# EAGLE board LED array - interface v1.3 (EAGLE 6.5.0)
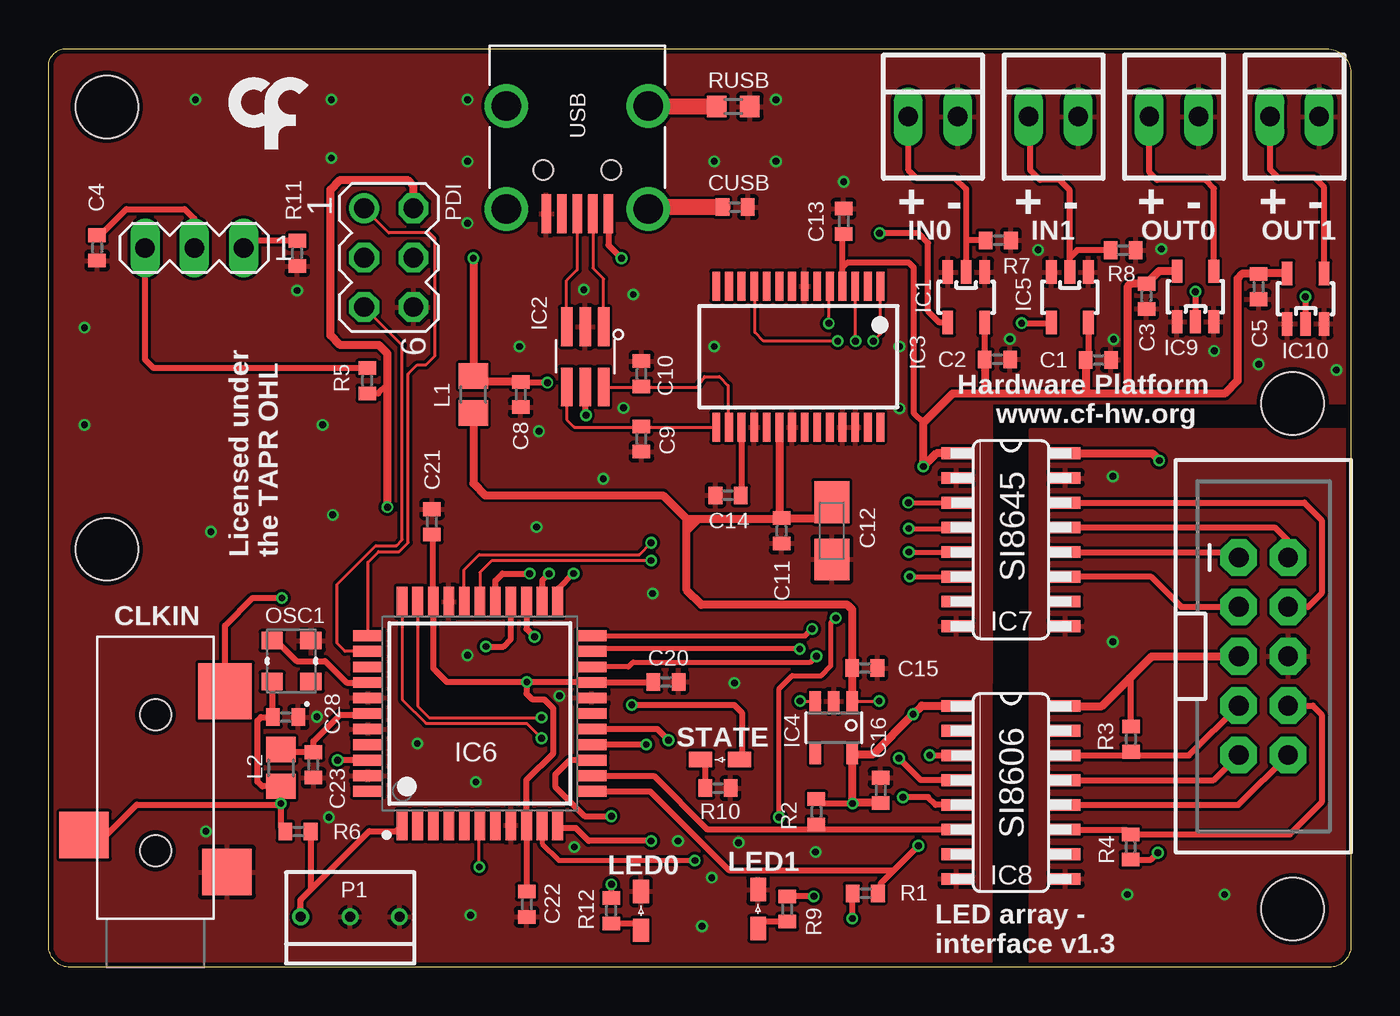
[diagram p0: board, top side]
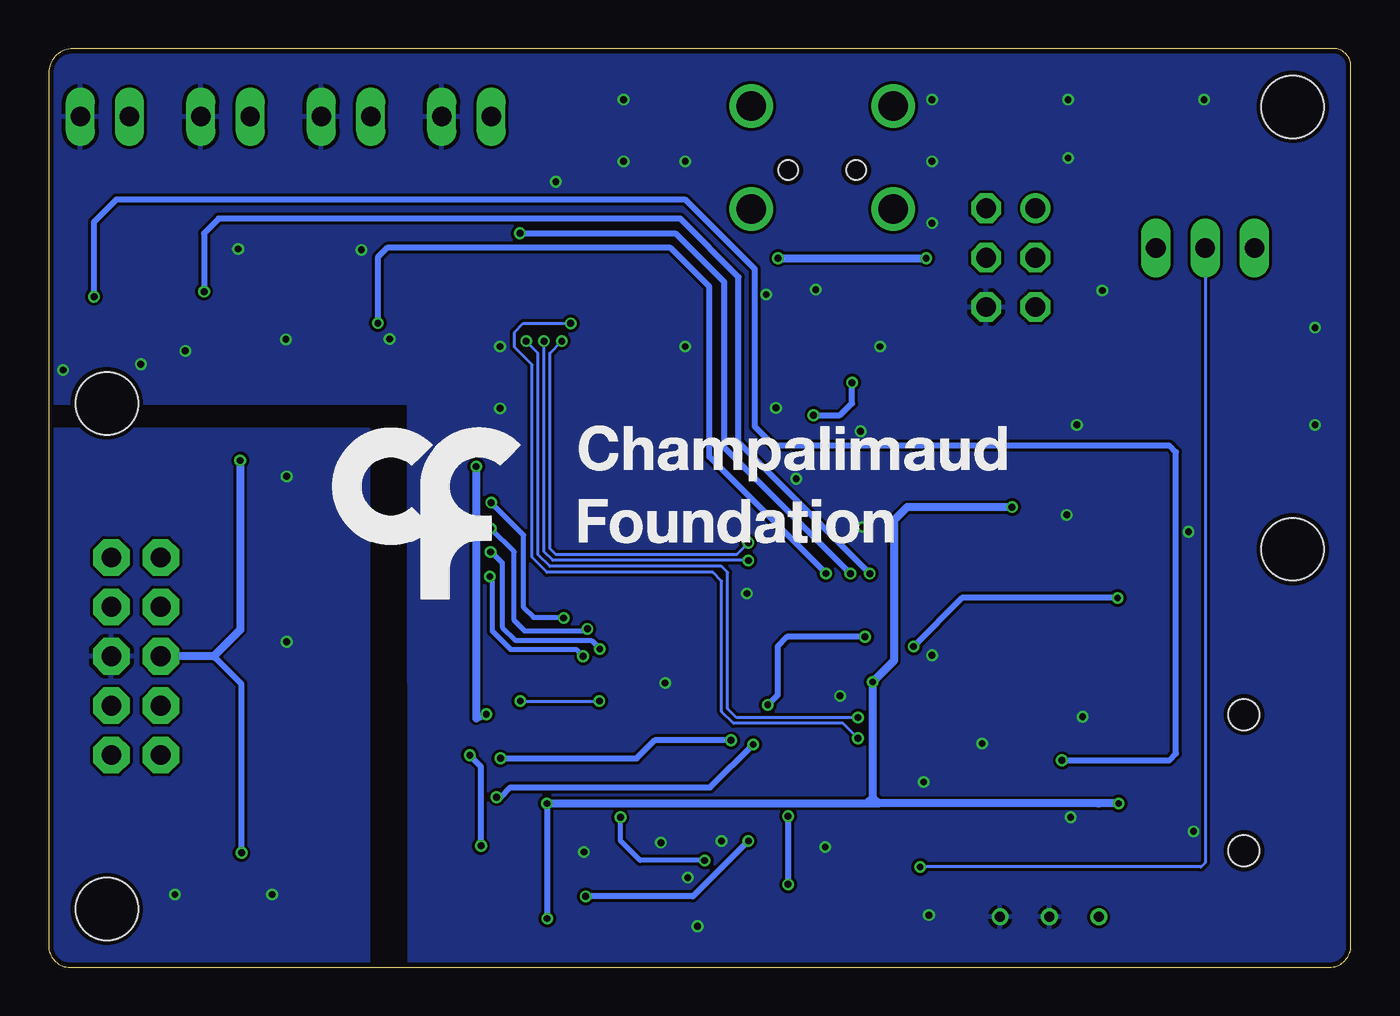
[diagram p1: board, bottom side, seen from below]

Size 67 x 47.25 mm. Coordinates in mm from the lower left corner, seen from the top.
Outline: 67,46 67,1.12 arc-90 65.88,0 1.12,0 arc-90 0,1.12 0,46.35 arc-90 0.9,47.25 65.75,47.25 arc-90 67,46
Copper layers (1*16): Top 0.018mm / dielectric 1.55mm / Bottom 0.018mm
Design rules "eC_2Layer_PClass6_BaseCopperO18_eCDefault *": minimum track width 0.15mm, minimum drill 0.35mm, track to track 0.15mm, track to pad 0.15mm, pad to pad 0.15mm, via to via 0.15mm, smd to smd 0mil, copper to edge 0.25mm, drill to drill 0.35mm, minimum pad ring 0.175mm, minimum via ring 0.125mm, stop-mask expansion 0mil, vias tented up to drill 0.45mm, thermal gap 0.2mm
Holes 3.2 mm at 3,44.25 3,21.5 64,29 64,3

## Footprints (pad centres in the part's own frame; a part is rotated, then mirrored left to right if it is on the bottom)
C0402 = smd 0.7 x 0.9: 1 -0.65,0; 2 0.65,0
A/3216-18W = smd 2.15 x 1.8: + 1.475,0; - -1.475,0
35RASMT2BHNTRX = smd 2.4 x 2.55: 1 0.8,3.675; 5 -1.1,-3.675 | smd 2.9 x 2.75: 4 8.2,-3.575 | hole 1.6: 0,0; 7,0
SOT23-5 = smd 0.55 x 1.2: 1 -0.95,-1.3; 2 0,-1.3; 3 0.95,-1.3; 4 0.95,1.3; 5 -0.95,1.3
SOT23-6L = smd 0.6 x 2: P$1 -0.95,-1.55; P$2 0,-1.55; P$3 0.95,-1.55; P$4 0.95,1.55; P$5 0,1.55; P$6 -0.95,1.55
SSOP28 = smd 0.4 x 1.5: 1 -4.225,-3.625; 2 -3.575,-3.625; 3 -2.925,-3.625; 4 -2.275,-3.625; 5 -1.625,-3.625; 6 -0.975,-3.625; 7 -0.325,-3.625; 8 0.325,-3.625; 9 0.975,-3.625; 10 1.625,-3.625; 11 2.275,-3.625; 12 2.925,-3.625; 13 3.575,-3.625; 14 4.225,-3.625; 15 4.225,3.625; 16 3.575,3.625; 17 2.925,3.625; 18 2.275,3.625; 19 1.625,3.625; 20 0.975,3.625; 21 0.325,3.625; 22 -0.325,3.625; 23 -0.975,3.625; 24 -1.625,3.625; 25 -2.275,3.625; 26 -2.925,3.625; 27 -3.575,3.625; 28 -4.225,3.625
TSOT23-5 = smd 0.6 x 1.05: 1 -0.95,-1.354; 2 0,-1.354; 3 0.95,-1.354; 4 0.95,1.354; 5 -0.95,1.354
QFP80P1200X1200X120-44N = smd 1.55 x 0.55: 1 -5.75,4; 2 -5.75,3.2; 3 -5.75,2.4; 4 -5.75,1.6; 5 -5.75,0.8; 6 -5.75,0; 7 -5.75,-0.8; 8 -5.75,-1.6; 9 -5.75,-2.4; 10 -5.75,-3.2; 11 -5.75,-4; 23 5.75,-4; 24 5.75,-3.2; 25 5.75,-2.4; 26 5.75,-1.6; 27 5.75,-0.8; 28 5.75,0; 29 5.75,0.8; 30 5.75,1.6; 31 5.75,2.4; 32 5.75,3.2; 33 5.75,4 | smd 0.55 x 1.55: 12 -4,-5.75; 13 -3.2,-5.75; 14 -2.4,-5.75; 15 -1.6,-5.75; 16 -0.8,-5.75; 17 0,-5.75; 18 0.8,-5.75; 19 1.6,-5.75; 20 2.4,-5.75; 21 3.2,-5.75; 22 4,-5.75; 34 4,5.75; 35 3.2,5.75; 36 2.4,5.75; 37 1.6,5.75; 38 0.8,5.75; 39 0,5.75; 40 -0.8,5.75; 41 -1.6,5.75; 42 -2.4,5.75; 43 -3.2,5.75; 44 -4,5.75
NSOIC-16 = smd 0.6 x 1.55: 1 -4.437,-2.789; 2 -3.167,-2.789; 3 -1.897,-2.789; 4 -0.627,-2.789; 5 0.643,-2.789; 6 1.913,-2.789; 7 3.183,-2.789; 8 4.453,-2.789; 9 4.453,2.811; 10 3.183,2.811; 11 1.913,2.811; 12 0.643,2.811; 13 -0.627,2.811; 14 -1.897,2.811; 15 -3.167,2.811; 16 -4.437,2.811
22-23-2021 = drill 1 long: 1 -1.27,0; 2 1.27,0
2X5-SHROUDED = drill 1.016 pad 1.88 octagon: 1 -1.27,5.08; 2 1.27,5.08; 3 -1.27,2.54; 4 1.27,2.54; 5 -1.27,0; 6 1.27,0; 7 -1.27,-2.54; 8 1.27,-2.54; 9 -1.27,-5.08; 10 1.27,-5.08
R0805 = smd 1.3 x 1.5: 1 -0.95,0; 2 0.95,0
LED_HAND = smd 1.2 x 0.8: A -1,0; K 1,0
OSCILLATOR_3.2X2.5 = smd 0.9 x 1.1: P$1 -1.05,-1; P$2 1.05,-1; P$3 1.05,1; P$4 -1.05,1
POT_BOURNS_3362M = drill 0.51: 1 -2.54,0; 2 0,0; 3 2.54,0
MA03-2 = drill 1.016: 1 -2.54,-1.27 | drill 1.016 octagon: 2 -2.54,1.27; 3 0,-1.27; 4 0,1.27; 5 2.54,-1.27; 6 2.54,1.27
R0402 = smd 0.7 x 0.9: 1 -0.65,0; 2 0.65,0
R0603 = smd 1 x 1.1: 1 -0.85,0; 2 0.85,0
MA03-1 = drill 1.016 long: 1 -2.54,0; 2 0,0; 3 2.54,0
240-0002-1 = smd 0.5 x 2: P$1 -1.6,8.65; P$2 -0.8,8.65; P$3 0,8.65; P$4 0.8,8.65; P$5 1.6,8.65 | drill 1.5: SHIELD_1 -3.65,3.1; SHIELD_2 3.65,3.1; SHIELD_3 3.65,8.4; SHIELD_4 -3.65,8.4 | hole 1: -1.75,6.4; 1.75,6.4

## Placement (x,y rotation side)
C1  100nF  [C0402]  54.01,31.24 0 top
C2  100nF  [C0402]  48.81,31.27 0 top
C3  100nF  [C0402]  56.48,34.51 270 top
C4  330nF NA  [C0402]  2.5,37 270 top
C5  100nF  [C0402]  62.25,35.01 270 top
C8  100nF  [C0402]  24.29,29.46 270 top
C9  47pF  [C0402]  30.5,27.18 270 top
C10  47pF  [C0402]  30.5,30.53 90 top
C11  100nF  [C0402]  37.7,22.45 270 top
C12  4.7uF  [A/3216-18W]  40.3,22.45 90 top
C13  100nF  [C0402]  40.9,38.37 90 top
C14  100nF  [C0402]  34.96,24.28 180 top
C15  4.7uF  [C0402]  41.99,15.39 180 top
C16  4.7uF  [C0402]  42.8,9.1 270 top
C20  100nF  [C0402]  31.76,14.68 0 top
C21  100nF  [C0402]  19.72,22.91 90 top
C22  100nF  [C0402]  24.6,3.25 270 top
C23  330nF  [C0402]  13.63,10.41 270 top
C28  100nF  [C0402]  12.2,12.87 0 top
CLKIN  [35RASMT2BHNTRX]  5.5,6 90 top
CUSB  4.7nF  [C0402]  35.32,39.1 0 top
IC1  SN74LVC1G125  [SOT23-5]  47.21,34.46 180 top
IC2  USBLC6-2SC6  [SOT23-6L]  27.61,31.4 180 top
IC3  FT232RL  [SSOP28]  38.57,31.41 180 top
IC4  LP5907  [TSOT23-5]  40.4,12.33 180 top
IC5  SN74LVC1G125  [SOT23-5]  52.54,34.46 180 top
IC6  ATXMEGAxxxA4U-AU  [QFP80P1200X1200X120-44N]  22.19,13.05 90 top
IC7  SI8645  [NSOIC-16]  49.5,22 270 top
IC8  SI8606  [NSOIC-16]  49.5,9 270 top
IC9  SN74LVC1G125  [SOT23-5]  59,34.5 0 top
IC10  SN74LVC1G125  [SOT23-5]  64.67,34.39 0 top
IN0  22-23-2021  [22-23-2021]  45.5,43.75 0 top
IN1  22-23-2021  [22-23-2021]  51.7,43.75 0 top
JP1  M05X2SHD  [2X5-SHROUDED]  62.5,16 0 top
L1  ???  [R0805]  21.85,29.46 90 top
L2  1u  [R0805]  11.95,10.26 270 top
LED0  GREEN  [LED_HAND]  30.48,2.91 90 top
LED1  GREEN  [LED_HAND]  36.5,3 90 top
OSC1  [OSCILLATOR_3.2X2.5]  12.5,15.75 90 top
OUT0  22-23-2021  [22-23-2021]  57.9,43.75 0 top
OUT1  22-23-2021  [22-23-2021]  64.1,43.75 0 top
P1  POT_BOURNS_3362M  [POT_BOURNS_3362M]  15.51,2.6 180 top
PDI  [MA03-2]  17.5,36.5 270 top
R1  3k  [R0402]  42.02,3.81 180 top
R2  3k  [R0402]  39.5,8 90 top
R3  3k  [R0402]  55.68,11.74 90 top
R4  3k  [R0402]  55.66,6.19 270 top
R5  100k NA  [R0402]  16.39,30.17 270 top
R6  1k 0.1%  [R0402]  12.83,6.99 180 top
R7  100k  [R0402]  48.86,37.39 180 top
R8  100k  [R0402]  55.28,36.88 180 top
R9  68  [R0402]  38,3 90 top
R10  68  [R0402]  34.44,9.21 180 top
R11  100k NA  [R0402]  12.79,36.72 90 top
R12  68  [R0402]  28.94,2.92 90 top
RUSB  1M  [R0603]  35.23,44.27 0 top
STATE  GREEN  [LED_HAND]  34.54,10.69 180 top
SV1  NA  [MA03-1]  7.5,37 180 top
U$1  [LOGO_5]  49.33,24.66 0 bottom
U$3  [LOGO_7]  10.5,44.5 0 top
USB  [240-0002-1]  27.2,47.4 180 top

## Library data of the parts
C1-C5 C8-C16 C20-C23 C28 CUSB L1 L2 R1-R12 RUSB = rcl
CLKIN USB = CNP-connectors
IC1 IC5 IC9 IC10 = My_library 0v2
IC2 = CNP 2
IC3 = ftdichip; MPN: FT232RL; OC_FARNELL: 1146032; OC_NEWARK: 91K9918
IC4 IC7 IC8 = CNP-ics 2
IC6 = xmega-a4
IN0 IN1 OUT0 OUT1 = con-molex; MF: MOLEX; MPN: 22-23-2021; OC_FARNELL: 1462926; OC_NEWARK: 25C3832
JP1 = SparkFun-Connectors
LED0 LED1 OSC1 P1 STATE U$1 U$3 = CNP-miscellaneous
PDI SV1 = con-lstb; OC_FARNELL: unknown; OC_NEWARK: unknown

## Nets
ADC: IC6.1 P1.3 R6.1
ADC1: R5.1 SV1.3
AUX0: IC6.22 IC7.4
AUX1: IC6.21 IC7.5
AVCC: C23.1 IC6.39 L2.1
CLK: IC8.11 JP1.8 R4.1
CLK_SYNC: CLKIN.4 IC6.26
DAT: IC8.14 JP1.7 R3.1
DO2: IC7.13 JP1.2
DO3: IC7.12 JP1.1
FT_CTS: IC3.11 IC6.29
FT_RTS: IC3.3 IC6.28
FT_RXD: IC3.5 IC6.33
FT_TXD: IC3.1 IC6.32
GND: IC7.9 IC7.15 IC8.9 JP1.6
GND2: IC5.2 IN1.1 R8.2
GNDIO: C1.2 C2.2 C3.2 C4.2 C5.2 C8.2 C9.2 C10.2 C11.2 C12.- C13.2 C14.2 C15.1 C16.1 C20.2 C21.2 C22.2 C23.2 C28.2 CLKIN.5 CUSB.2 IC1.1 IC1.3 IC2.P$2 IC3.7 IC3.18 IC3.21 IC3.25 IC3.26 IC4.2 IC5.1 IC5.3 IC6.8 IC6.18 IC6.30 IC6.38 IC6.40 IC6.43 IC7.2 IC7.8 IC8.8 IC9.1 IC9.3 IC10.1 IC10.3 IN0.2 IN1.2 LED0.K LED1.K OSC1.P$2 OUT0.2 OUT1.2 P1.1 P1.2 PDI.6 R7.1 R8.1 R10.1 R11.1 RUSB.2 USB.P$5
IN0: IC1.4 IC6.24
IN1: IC5.4 IC6.23
LED0: IC6.14 R12.2
LED0_PWR: IC6.15 IC8.5
LED0_TRANS: IC6.10 IC7.3
LED1: IC6.11 R9.2
LED1_PWR: IC6.16 IC8.4
LED1_TRANS: IC6.20 IC7.6
MODE0: C4.1 IC6.6 SV1.2
N$1: R11.2 SV1.1
N$2: C14.1 IC3.17
N$3: IC9.4 OUT0.1
N$4: IC2.P$3 USB.P$3
N$6: LED0.A R12.1
N$7: IC10.4 OUT1.1
N$8: R10.2 STATE.K
N$9: IC1.2 IN0.1 R7.2
N$24: LED1.A R9.1
N$39: C8.1 IC2.P$5 L1.2 USB.P$1
N$40: IC2.P$1 USB.P$2
N$59: CUSB.1 USB.SHIELD_4
N$61: RUSB.1 USB.SHIELD_1
ON_IR: IC8.13 JP1.9
ON_LED: IC8.12 JP1.10
OSC1: IC6.37 OSC1.P$3
OUT0: IC6.27 IC9.2
OUT1: IC6.42 IC10.2
PDI-CLK: IC6.35 PDI.5
PDI-DATA: IC6.34 PDI.1
SCL: IC6.13 IC8.6 R2.1
SDA: IC6.12 IC8.3 R1.1
STATE_: IC6.25 STATE.A
TOG_IR: IC7.11 JP1.3
TOG_RED: IC7.14 JP1.4
USB5V: C11.1 C12.+ C15.2 IC3.20 IC4.1 IC4.3 L1.1
USBDM: C10.1 IC2.P$6 IC3.16
USBDP: C9.1 IC2.P$4 IC3.15
VCCIO: C1.1 C2.1 C3.1 C5.1 C13.1 C16.2 C20.1 C21.1 C22.1 C28.1 CLKIN.1 IC1.5 IC3.4 IC4.5 IC5.5 IC6.9 IC6.19 IC6.31 IC7.1 IC8.1 IC9.5 IC10.5 L2.2 OSC1.P$4 PDI.2 R1.2 R2.2 R5.2 R6.2
VDD: IC7.16 IC8.16 JP1.5 R3.2 R4.2

## Tracks (layer width: path | path; a pad name or v marks a point on that pad's centre or on a via)
ADC
  Top 0.305: 13.48,3.98 16.5,7 17.89,7 IC6.1 | 12.94,3.02 P1.3 12.96,3.46 13,3.5 13.48,3.98 | R6.1 13.48,3.98
ADC1
  Top 0.305: 5,36.96 SV1.3 4.97,31.25 5.4,30.82 R5.1
AUX0  (via drill 0.35 pad 0.6)
  Top 0.254: IC6.22 38.92,17.05 v39.28,17.41 | v44.25,22.57 46.65,22.57 IC7.4
  Bottom 0.254: v44.25,22.57 43.05,21.37 43.05,17.84 42.52,17.31 39.38,17.31 v39.28,17.41
AUX1  (via drill 0.35, 0.35 pad 0.6)
  Top 0.254: v38.64,16.37 28.06,16.37 IC6.21 | v44.26,21.36 IC7.5
  Bottom 0.254: v38.64,16.37 39.08,16.81 42.97,16.81 43.66,17.5 43.66,20.81 44.21,21.36 44.38,21.36 v44.26,21.36
AVCC
  Top 0.305: IC6.39 16.39,13 15,13 13.62,11.63 C23.1 11.95,11.06 L2.1
CLK
  Top 0.305: 52.4,7 IC8.11 52.35,7.05 55.5,7.05 55.66,6.89 R4.1 63.86,6.84 65.5,8.48 65.5,13 65.04,13.46 JP1.8
CLK_SYNC  (via drill 0.35)
  Top 0.305: CLKIN.4 9.07,17.57 10.5,19 v12,19 | v22.5,16.5 23.4,16.5 23.79,16.89 IC6.26
  Bottom 0.305: v12,19 20,19 v22.5,16.5
DAT
  Top 0.305: IC8.14 55.5,10.9 | JP1.7 58.67,10.9 55.5,10.9 | R3.1 55.68,11.08 55.5,10.9
DO2
  Top 0.305: IC7.13 63.08,22.63 63.75,21.96 63.75,21.1 JP1.2
DO3
  Top 0.305: IC7.12 60.96,21.35 JP1.1
FT_CTS  (via drill 0.35)
  Top 0.152: IC6.29 21.39,20.46 22.16,21.23 30.39,21.23 v31,21.84 | v40.6,32.2 36.79,32.2 36.33,32.66 36.33,35 IC3.11
  Bottom 0.152: v31,21.84 31.61,21.23 40.91,21.23 41.21,21.54 41.21,31.59 v40.6,32.2
FT_RTS  (via drill 0.35)
  Top 0.152: v31,20.93 22.81,20.93 22.19,20.31 IC6.28 | v41.51,32.2 41.51,35.02 IC3.3
  Bottom 0.152: v31,20.93 41.06,20.93 41.51,21.38 v41.51,32.2
FT_RXD  (via drill 0.35)
  Top 0.152: IC6.33 18.19,13.77 19.42,12.54 24.6,12.54 v25.36,11.78 | v40.14,33.12 40.14,34.98 IC3.5
  Bottom 0.152: v25.36,11.78 26.12,12.54 31.76,12.54 32.37,13.15 32.37,19.86 32.83,20.32 41.36,20.32 42.12,21.08 42.12,30.98 43.04,31.9 43.04,32.66 42.58,33.12 v40.14,33.12
FT_TXD  (via drill 0.35)
  Top 0.152: IC6.32 18.99,13.43 19.57,12.85 v25.36,12.85 | v42.43,32.2 42.8,32.57 IC3.1
  Bottom 0.152: v25.36,12.85 31.61,12.85 32.07,13.31 32.07,20.32 32.37,20.62 41.21,20.62 41.82,21.23 41.82,31.59 v42.43,32.2
GND  (via drill 0.35)
  other vias: 55.5,3.75 60.5,3.75 54.75,16.75 54.75,25.25
  pour Top: 50.5,0.16 50.5,27.67 66.99,27.67 66.99,0.16
  pour Bottom: 50.5,0.16 50.5,27.67 66.99,27.67 66.99,0.16
GND2
  Top 0.305: IC5.2 52.54,36.5 | R8.2 52.92,36.88 52.54,36.5 | 52.54,36.5 52.54,39.96 52,40.5 51,40.5 50.5,41 50.5,43.68 IN1.1
GNDIO  (via drill 0.35)
  other vias: 34.25,41.45 21.55,41.45 8.35,22.4 21.98,9.53 37.42,41.45 37.42,44.62 30.07,34.6 43.77,31.93 43.77,28.75 34.25,31.93 31.07,19.23 21.55,44.62 21.55,38.27 24.23,31.93 25.23,27.57 18.98,11.51 21.55,16.05 14.62,23.27 8.09,7 35.28,14.62 21.71,2.69 14.55,44.62 25.1,22.65 57.24,36.95 59.97,31.7 49.45,32.31 54.8,32.3 39.46,5.93 7.55,44.62 14.55,41.62 1.85,27.9 1.85,32.9 14.1,27.9 12.79,34.81 34.12,4.62 33.62,2.12 35.5,6.42 40.91,40.4 66.25,30.73 50.91,36.9 62.26,31.02 13.8,12.89 29.57,28.77 28.54,25.12 14.42,7.72 27.54,34.85 32.38,6.5 27.04,6.19 26.28,13.96
  pour Top: 0.16,0.16 0.16,47.25 67,47.25 67,29 48.5,29 48.49,0.16
  pour Bottom: 0.16,0.16 0.16,47.25 67,47.25 67,29 48.5,29 48.49,0.16
IN0  (via drill 0.35 pad 0.6)
  Top 0.305: v25.75,20.25 v25.74,20.25 25.39,19.9 IC6.24 | IC1.4 45.84,33.16 45.25,33.75 45.25,37.25 44.75,37.75 v42.75,37.75
  Bottom 0.305: v42.75,37.75 34.75,37.75 32.25,35.25 32.25,26.75 v25.75,20.25
IN1  (via drill 0.35 pad 0.6)
  Top 0.305: v50.06,33.13 51.56,33.13 IC5.4 | 26.19,19.2 IC6.23 26.25,18.86 26.25,19.5 v27.01,20.26
  Bottom 0.305: v27.01,20.26 33,26.25 33,35 35,37 49.58,37 50.07,36.51 v50.07,33.14 v50.06,33.13
LED0  (via drill 0.35)
  Top 0.254: IC6.14
  Top 0.305: IC6.14 26.8,10.65 26.06,9.91 26.06,9.3 27.58,7.77 v28.96,7.77 | v28.96,4.27 28.94,4.25 R12.2
  Bottom 0.305: v28.96,7.77 v28.96,4.27
LED0_PWR  (via drill 0.35)
  Top 0.305: IC8.5 45.64,8.36 45.25,8.75 v43.95,8.75 | v30.75,11.46 IC6.15
  Bottom 0.305: v43.95,8.75 43.75,8.75 43.25,9.25 32.96,9.25 v30.75,11.46
LED0_TRANS  (via drill 0.35, 0.35 pad 0.6)
  Top 0.254: v44.23,23.9 IC7.3 | 40.29,17.76 v40.5,17.97 40.25,17.72 40.25,15.5 39.75,15 38.25,15 37.58,14.33 v37.58,7.72 | IC6.10 25.39,6.36 26.25,5.5 v33.25,5.5
  Bottom 0.254: v40.5,17.97 40.78,18 42.06,18 42.56,18.5 42.56,22.23 v44.23,23.9 | v33.25,5.5 36.56,5.5 37.58,6.52 v37.58,7.72
LED1  (via drill 0.35)
  Top 0.305: v39.37,3.65 R9.2 | v31,6.5 27.79,6.5 27.13,7.16 26.33,7.16 IC6.11
  Bottom 0.305: v31,6.5 33.85,3.65 v39.37,3.65
LED1_PWR  (via drill 0.35, 0.35 pad 0.6)
  Top 0.305: IC8.4 44.87,9.63 v43.75,10.75 | IC6.16 31.32,12.25 v31.89,11.68
  Bottom 0.305: v43.75,10.75 36.75,10.75 35.82,11.68 v31.89,11.68
LED1_TRANS  (via drill 0.35 pad 0.6)
  Top 0.254: IC6.20 29.82,15.45 30.07,15.7 39.2,15.7 v39.5,16 | v44.3,20.1 46.7,20.1
  Top 0.305: 46.7,20.1 IC7.6
  Bottom 0.254: v39.5,16 39.85,16.35 43.24,16.35 44.17,17.28 44.17,19.97 v44.3,20.1
MODE0  (via drill 0.35)
  Top 0.152: v22.16,5.16 22.16,7.28 IC6.6
  Top 0.305: C4.1 2.65,37.65 4,39 7,39 7.5,38.5 SV1.2
  Bottom 0.152: v22.16,5.16 7.72,5.16 7.5,5.38 SV1.2
N$1
  Top 0.305: R11.2 10.41,37.37 SV1.1
N$2
  Top 0.305: IC3.17 35.65,24.32 C14.1
N$3
  Top 0.305: IC9.4 59.95,40.05 59.5,40.5 57.02,40.5 56.64,40.88 OUT0.1
  Top 0.406: OUT0.1
N$4
  Top 0.152: IC2.P$3 26.66,35.33 27.2,35.87 USB.P$3
N$6
  Top 0.305: R12.1 30.12,2.27 LED0.A
N$7
  Top 0.305: IC10.4 65.62,40.11 65.13,40.6 63.27,40.6 62.84,41.03 OUT1.1
N$8
  Top 0.305: R10.2 33.79,10.44 STATE.K
N$9
  Top 0.305: IC1.2 47.21,37.5 | 47.21,37.5 47.21,40.02 46.64,40.59 44.65,40.59 44.24,41 IN0.1 | R7.2 47.32,37.39 47.21,37.5
N$24
  Top 0.305: R9.1 36.85,2.35 LED1.A
N$39  (via drill 0.35)
  Top 0.305: IC2.P$5 27.61,28.43 v27.65,28.39 | v25.66,30.07 24.33,30.07 C8.1 | USB.P$1 28.8,37.15 v29.48,36.47
  Top 0.406: v21.86,36.47 L1.2 22.16,30.11 C8.1
  Bottom 0.305: v27.65,28.39 26.27,28.39 25.66,29 v25.66,30.07
  Bottom 0.406: v29.48,36.47 v21.86,36.47
N$40
  Top 0.152: IC2.P$1 28.56,35.41 28,35.97 USB.P$2
N$59
  Top 0.813: CUSB.1 30.95,39.1 USB.SHIELD_4
N$61
  Top 0.813: RUSB.1 30.88,44.27 USB.SHIELD_1
ON_IR
  Top 0.305: IC8.13 59.94,9.63 JP1.9
ON_LED
  Top 0.305: IC8.12 61.21,8.36 JP1.10
OSC1
  Top 0.305: OSC1.P$3 11.7,16.8 12.75,15.75 14.22,15.75 15.33,14.64 16.43,14.64 IC6.37
OUT0  (via drill 0.35)
  Top 0.305: v59,34.75 IC9.2 | IC6.27 22.99,19.89 23.35,20.25 v24.75,20.25
  Bottom 0.305: v24.75,20.25 31.5,27 31.5,35.5 34.5,38.5 58.25,38.5 59,37.75 v59,34.75
OUT1  (via drill 0.35)
  Top 0.305: IC10.2 v64.67,34.48 v64.66,34.49 | IC6.42 v14.87,10.65
  Bottom 0.305: v64.66,34.49 64.66,38.34 63.5,39.5 34.26,39.5 30.68,35.92 30.68,27.82 29.71,26.85 9.35,26.85 9,26.5 9,11 9.35,10.65 v14.87,10.65
PDI-CLK
  Top 0.152: IC6.35 15.25,16.25 14.84,16.66 14.84,19.71 16.83,21.69 17.89,21.69 18.2,21.99 18.2,31.99 PDI.5
PDI-DATA
  Top 0.152: IC6.34 16.44,20.84 16.98,21.38 18.05,21.38 18.5,21.84 18.5,30.53 18.96,30.98 19.42,30.98 19.87,31.44 19.87,37.5 19.6,37.77 17.5,37.77 PDI.1
SCL
  Top 0.305: IC8.6 39.5,7.09 | 39.5,7.09 33.9,7.09 31.14,9.85 IC6.13 | R2.1 39.5,7.09
SDA  (via drill 0.35 pad 0.6)
  Top 0.305: 43.49,5 35,5 30.95,9.05 IC6.12 | v44.75,6.25 43.5,5 43.49,5 | v45.33,10.91 46.7,10.91 IC8.3 | 43.49,5 42.8,4.31 42.8,3.94 R1.1
  Bottom 0.305: v44.75,6.25 44.75,10.33 v45.33,10.91
STATE_  (via drill 0.35)
  Top 0.305: IC6.25 24.59,17.41 v25,17 | v30,13.5 35.27,13.5 35.66,13.11 35.66,10.81 STATE.A
  Bottom 0.305: v25,17 29,17 29.5,16.5 29.5,14 v30,13.5
TOG_IR
  Top 0.305: JP1.3 58.27,18.54 56.72,20.09 IC7.11
TOG_RED
  Top 0.305: JP1.4 64.8,18.54 65.5,19.24 65.5,23 64.6,23.9 IC7.14
USB5V  (via drill 0.35)
  Top 0.152: IC4.1 42.72,13.68 v42.73,13.7 | v38.66,13.7 39.43,13.7 IC4.3
  Top 0.406: L1.1 21.86,24.89 22.46,24.28 31.61,24.28 32.83,23.06 | 32.83,23.06 33.44,23.06 | 33.44,23.06 37.66,23.06 C11.1 | IC3.20 37.6,23.21 C11.1 | C11.1 39.47,23.1 C12.+ | 32.83,22.45 32.83,19.4 33.59,18.64 41.11,18.64 41.34,18.41 C15.2 IC4.1 | 32.83,22.45 32.83,23.06 | 33.44,23.06 32.83,22.45 | 41.36,13.7 IC4.1 | IC4.1
  Bottom 0.152: v42.73,13.7 v38.66,13.7
USBDM
  Top 0.152: IC2.P$6 31,29.85 | 31,29.85 33.37,29.85 33.74,30.38 34.5,30.38 34.96,29.92 34.96,27.82 IC3.16 | C10.1 31,29.85
USBDP
  Top 0.152: IC2.P$4 26.66,28.16 27.04,27.79 31,27.79 | 31,27.79 IC3.15 | C9.1 31,27.79
VCCIO  (via drill 0.35, 0.35 pad 0.6)
  Top 0.305: C22.1 24.59,3.91 IC6.9 24.59,9.64 25.97,11.02 25.97,13.31 25.51,13.76 24.9,13.76 24.59,14.08 24.59,14.67 | C20.1 31.09,14.65 IC6.19 27.91,14.68 v24.6,14.68 24.59,14.67 | C21.1 19.79,22.19 IC6.31 19.79,15.37 20.48,14.68 24.58,14.68 24.59,14.67 | IC3.4 40.85,36 | 40.85,36 40.85,37.66 C13.1 | v11.95,8.43 L2.2 10.99,9.3 10.75,9.54 10.75,12.69 10.93,12.87 C28.1 11.5,12.92 OSC1.P$4 | 40.85,36 41.08,36.23 44.28,36.23 44.28,36.22 44.5,36 44.5,28.5 45,28 | C2.1 IC1.5 | IC5.5 53.5,31.38 C1.1 | v41.35,2.51 41.35,3.79 R1.2 | R2.2 39.53,8.65 39.75,8.43 v41.36,8.43 | R5.2 16.95,29.52 17.43,30 17.43,30.83 | v11.95,8.43 11.95,7.22 R6.2 | CLKIN.1 2.97,6.8 4.54,8.37 11.89,8.37 v11.95,8.43
  Top 0.406: 17.32,23.63 v17.43,23.67 17.43,30.83 17.43,31.57 17,32 15,32 14.5,32.5 14.5,40 15,40.5 18.46,40.5 18.76,40.2 PDI.2 | C16.2 41.38,8.45 v41.36,8.43 41.36,10.96 IC4.5 42.43,10.97 v44.48,13.02 44.92,13.46 46.69,13.46 IC8.1 | IC7.1 45.68,26.44 v45,25.76 45,28 46.5,29.5 48,29.5 | 55.5,29.5 60.5,29.5 61.16,30.16 61.16,35.42 61.4,35.66 C5.1 62.28,35.69 IC10.5 | 55.5,29.5 53.5,29.5 | 53.5,29.5 48,29.5 | C2.1 48.16,29.66 48,29.5 | IC9.5 57.12,35.8 C3.1 55.66,35.16 55.5,35 55.5,29.5 | C1.1 53.36,29.64 53.5,29.5
  Bottom 0.305: v41.36,8.43 41.36,2.52 v41.35,2.51 | 12.94,8.37 13,8.43
  Bottom 0.406: v17.43,23.67 22.83,23.67 23.5,23 23.5,15.78 v24.6,14.68 24.59,14.67 24.59,8.74 24.6,8.73 | v11.95,8.43 13,8.43 24.29,8.43 | v41.36,8.43 24.9,8.43 | 24.9,8.43 24.29,8.43 | 24.6,8.73 24.9,8.43 | 24.6,8.73 24.29,8.43 | v45,25.76 45,12.8 v44.48,13.02
VDD  (via drill 0.35 pad 0.6)
  Top 0.305: R4.2 56.72,5.54 v57.07,5.89 | R3.2 55.68,14.82 55.62,14.88
  Top 0.406: IC8.16 54.19,13.44 55.62,14.88 56.75,16 JP1.5 | IC7.16 56.77,26.44 v57.14,26.07
  Bottom 0.305: v57.07,5.89 57.07,14.57 58.5,16
  Bottom 0.406: JP1.5 58.5,16 57.14,17.36 v57.14,26.07

## Text on the board
tPlace: + | - | + | - | + | - | + | - | Hardware Platform | www.cf-hw.org | Licensed under / the TAPR OHL | LED array - / interface v1.3 | Licensed under the TAPR Open / Hardware License (www.tapr.org/OHL) / / Copyright 2016-2018 Artur Silva and Filipe Carvalho